# EAGLE board adc2 (EAGLE 5.06)
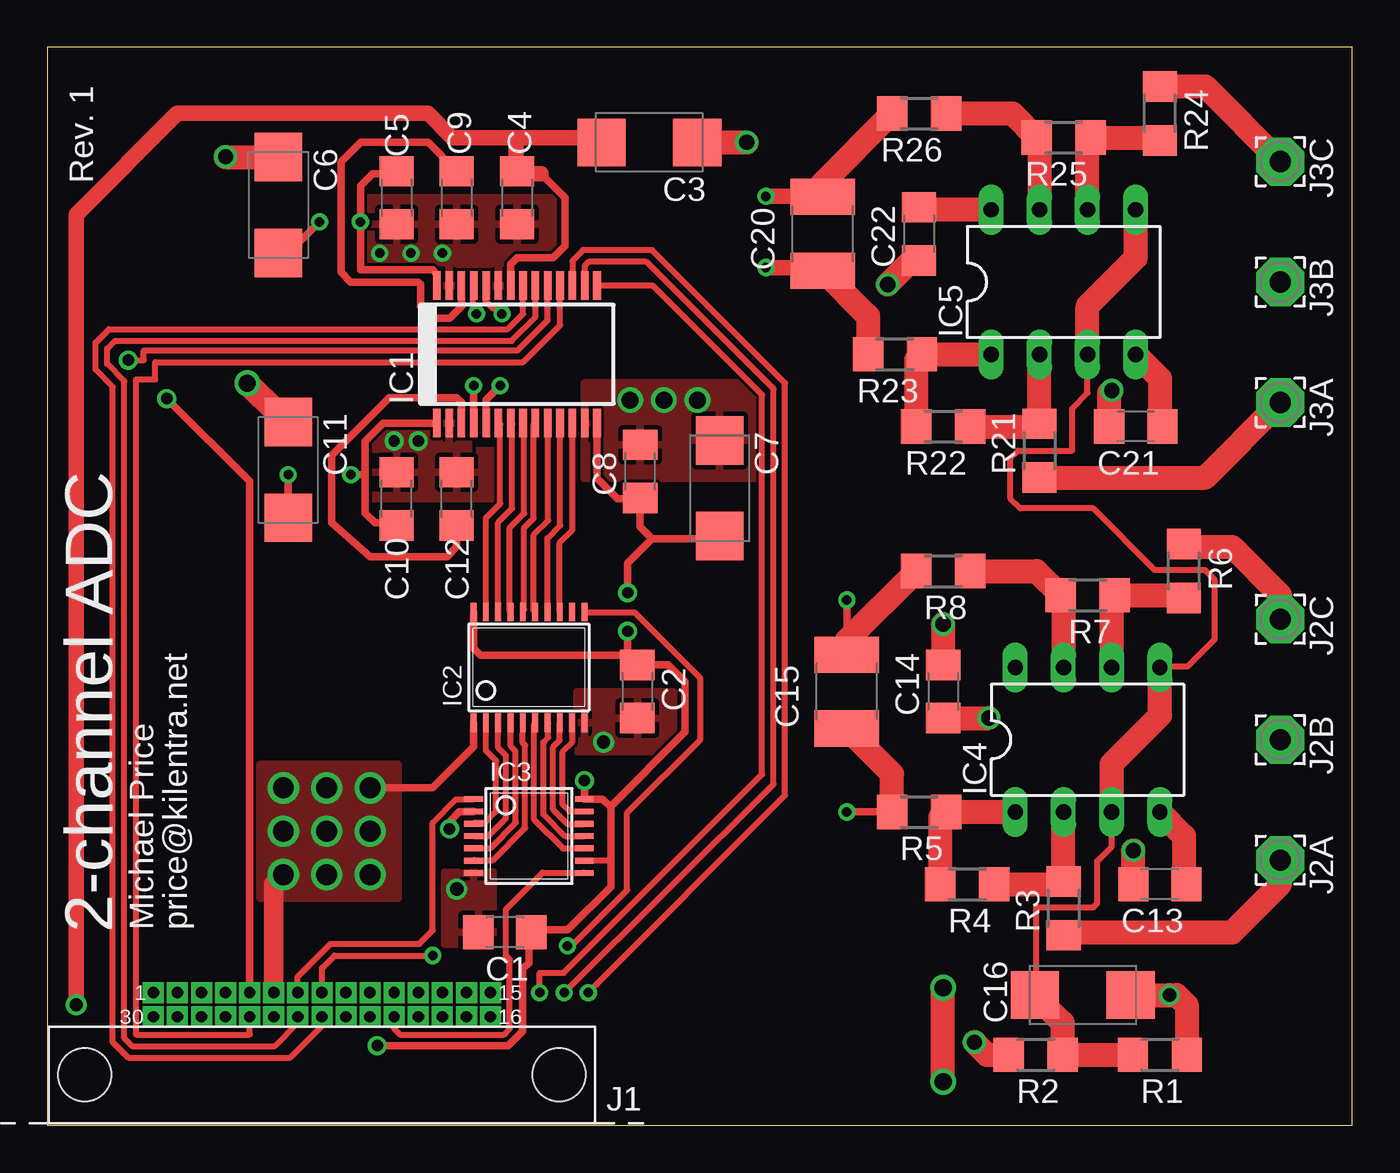
[diagram p0: board, top side]
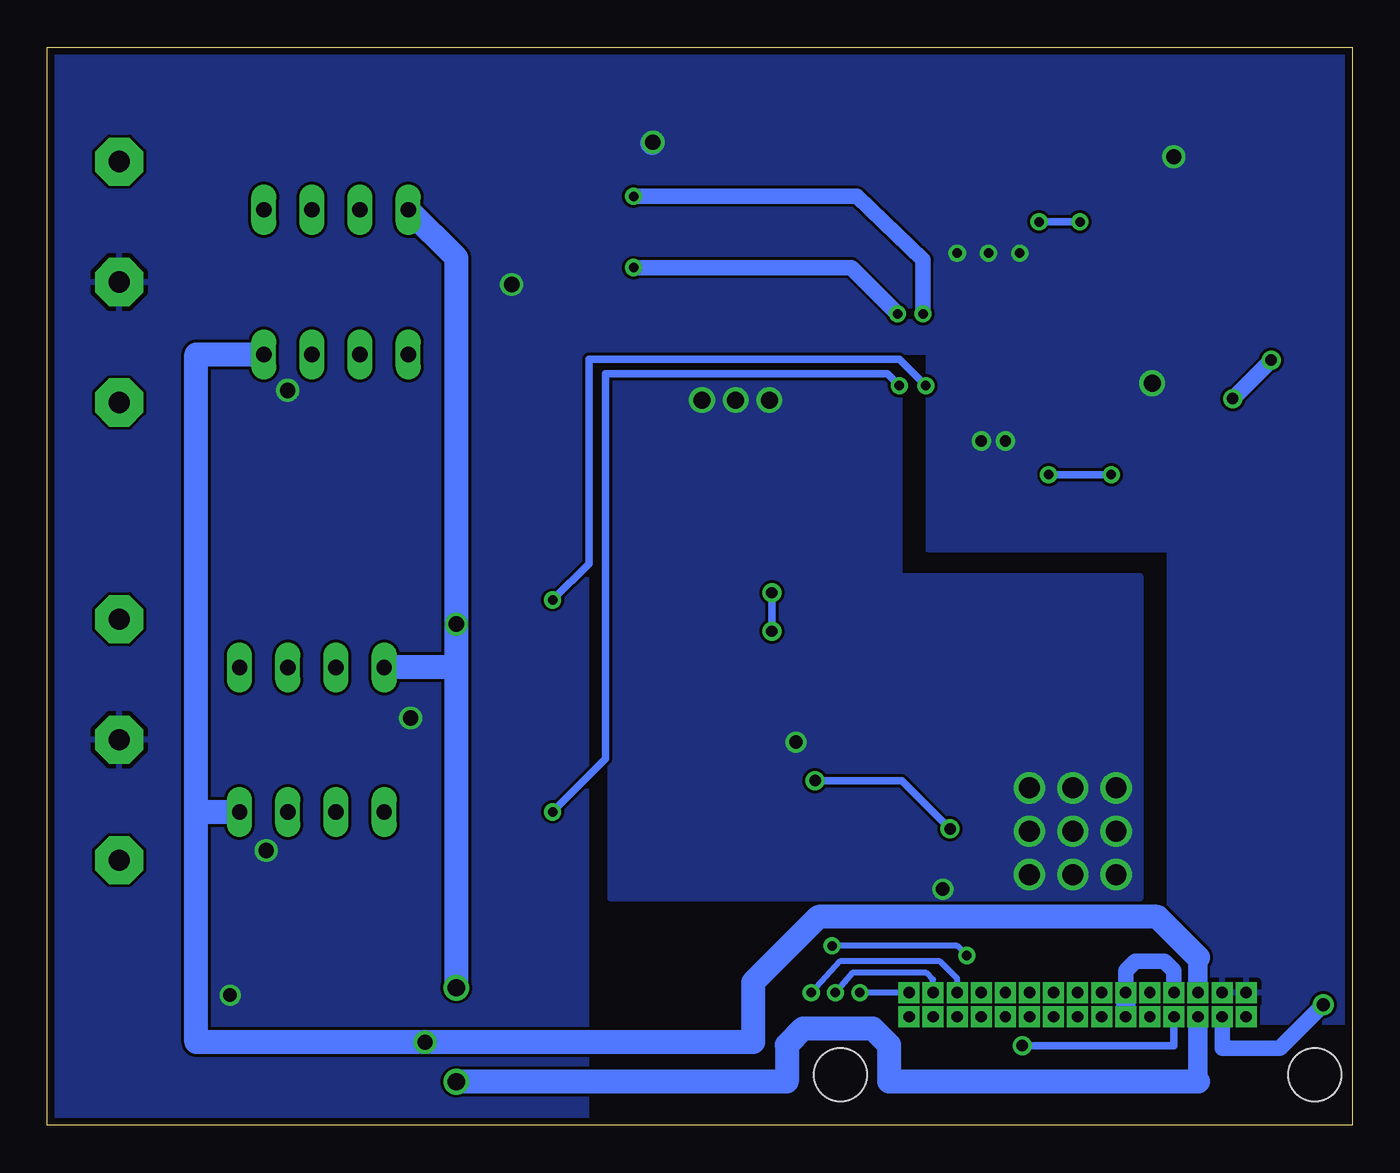
[diagram p1: board, bottom side, seen from below]

Size 68.81 x 56.82 mm. Coordinates in mm from the lower left corner, seen from the top.
Outline: 0,0 68.81,0 68.81,56.82 0,56.82 0,0
Copper layers (1*16): Top 0.035mm / dielectric 1.5mm / Bottom 0.035mm
Design rules "6mils": minimum track width 10mil, minimum drill 15mil, track to track 6mil, track to pad 6mil, pad to pad 6mil, via to via 6mil, smd to smd 6mil, copper to edge 15mil, drill to drill 8mil, minimum pad ring 10mil, minimum via ring 8mil, stop-mask expansion 4mil, vias tented up to drill 0mil, thermal gap 10mil

## Footprints (pad centres in the part's own frame; a part is rotated, then mirrored left to right if it is on the bottom)
C1206 = smd 1.6 x 1.8: 1 -1.4,0; 2 1.4,0
C/6032-28R = smd 2.55 x 2.5: + 2.525,0; - -2.525,0
C1812 = smd 1.9 x 3.4: 1 -1.95,0; 2 1.95,0
SSOP28 = smd 0.4 x 1.5: 1 -4.225,-3.625; 2 -3.575,-3.625; 3 -2.925,-3.625; 4 -2.275,-3.625; 5 -1.625,-3.625; 6 -0.975,-3.625; 7 -0.325,-3.625; 8 0.325,-3.625; 9 0.975,-3.625; 10 1.625,-3.625; 11 2.275,-3.625; 12 2.925,-3.625; 13 3.575,-3.625; 14 4.225,-3.625; 15 4.225,3.625; 16 3.575,3.625; 17 2.925,3.625; 18 2.275,3.625; 19 1.625,3.625; 20 0.975,3.625; 21 0.325,3.625; 22 -0.325,3.625; 23 -0.975,3.625; 24 -1.625,3.625; 25 -2.275,3.625; 26 -2.925,3.625; 27 -3.575,3.625; 28 -4.225,3.625
TSSOP20 = smd 0.305 x 0.991: 1 -2.925,-2.918; 2 -2.275,-2.918; 3 -1.625,-2.918; 4 -0.975,-2.918; 5 -0.325,-2.918; 6 0.325,-2.918; 7 0.975,-2.918; 8 1.625,-2.918; 9 2.275,-2.918; 10 2.925,-2.918; 11 2.925,2.918; 12 2.275,2.918; 13 1.625,2.918; 14 0.975,2.918; 15 0.325,2.918; 16 -0.325,2.918; 17 -0.975,2.918; 18 -1.625,2.918; 19 -2.275,2.918; 20 -2.925,2.918
TSSOP14 = smd 0.305 x 0.991: 1 -1.95,-2.918; 2 -1.3,-2.918; 3 -0.65,-2.918; 4 0,-2.918; 5 0.65,-2.918; 6 1.3,-2.918; 7 1.95,-2.918; 8 1.95,2.918; 9 1.3,2.918; 10 0.65,2.918; 11 0,2.918; 12 -0.65,2.918; 13 -1.3,2.918; 14 -1.95,2.918
DIL08 = drill 0.813 long: 1 -3.81,-3.81; 2 -1.27,-3.81; 3 1.27,-3.81; 4 3.81,-3.81; 5 3.81,3.81; 6 1.27,3.81; 7 -1.27,3.81; 8 -3.81,3.81
FCI-RA-30 = drill 0.6 pad 0.813 square: P$A1 -8.89,0.635; P$A2 -7.62,0.635; P$A3 -6.35,0.635; P$A4 -5.08,0.635; P$A5 -3.81,0.635; P$A6 -2.54,0.635; P$A7 -1.27,0.635; P$A8 0,0.635; P$A9 1.27,0.635; P$A10 2.54,0.635; P$A11 3.81,0.635; P$A12 5.08,0.635; P$A13 6.35,0.635; P$A14 7.62,0.635; P$A15 8.89,0.635; P$A16 8.89,-0.635; P$A17 7.62,-0.635; P$A18 6.35,-0.635; P$A19 5.08,-0.635; P$A20 3.81,-0.635; P$A21 2.54,-0.635; P$A22 1.27,-0.635; P$A23 0,-0.635; P$A24 -1.27,-0.635; P$A25 -2.54,-0.635; P$A26 -3.81,-0.635; P$A27 -5.08,-0.635; P$A28 -6.35,-0.635; P$A29 -7.62,-0.635; P$A30 -8.89,-0.635 | hole 2.8: -12.497,-3.708; 12.497,-3.708
2,54/1,1 = drill 1.118 pad 2.54 octagon: 1 0,0
R1206 = smd 1.6 x 1.803: 1 -1.422,0; 2 1.422,0

## Placement (x,y rotation side)
C1  0.1u  [C1206]  24.13,10.16 180 top
C2  0.1u  [C1206]  31.11,22.86 270 top
C3  10u  [C/6032-28R]  31.75,51.82 180 top
C4  0.1u  [C1206]  24.77,48.9 270 top
C5  0.1u  [C1206]  18.41,48.9 270 top
C6  10u  [C/6032-28R]  12.19,48.51 270 top
C7  10u  [C/6032-28R]  35.46,33.58 270 top
C8  0.1u  [C1206]  31.27,34.47 90 top
C9  0.1u  [C1206]  21.59,48.9 270 top
C10  0.1u  [C1206]  18.41,33.02 90 top
C11  10u  [C/6032-28R]  12.7,34.54 270 top
C12  0.1u  [C1206]  21.59,33.02 90 top
C13  0.1u  [C1206]  58.67,12.7 180 top
C14  0.1u  [C1206]  47.24,22.86 270 top
C15  0.01u  [C1812]  42.16,22.86 90 top
C16  10u  [C/6032-28R]  54.61,6.86 0 top
C20  0.01u  [C1812]  40.89,46.99 90 top
C21  0.1u  [C1206]  57.4,36.83 180 top
C22  0.1u  [C1206]  45.97,46.99 270 top
IC1  PCM4202  [SSOP28]  24.77,40.64 0 top
IC2  74LVTH574  [TSSOP20]  25.4,24.13 0 top
IC3  74164FT  [TSSOP14]  25.4,15.24 270 top
IC4  OPA2134PA  [DIL08]  54.86,20.32 0 top
IC5  OPA2134PA  [DIL08]  53.59,44.45 0 top
J1  RA-30  [FCI-RA-30]  14.48,6.35 0 top
J2A  [2,54/1,1]  65.02,13.97 270 top
J2B  [2,54/1,1]  65.02,20.32 270 top
J2C  [2,54/1,1]  65.02,26.67 270 top
J3A  [2,54/1,1]  65.02,38.1 270 top
J3B  [2,54/1,1]  65.02,44.45 270 top
J3C  [2,54/1,1]  65.02,50.8 270 top
R1  2.5k  [R1206]  58.67,3.71 180 top
R2  12.5k  [R1206]  52.12,3.71 180 top
R3  10k  [R1206]  53.59,11.43 90 top
R4  4.42k  [R1206]  48.51,12.7 180 top
R5  47.5  [R1206]  45.97,16.51 180 top
R6  10k  [R1206]  59.94,29.21 270 top
R7  4.42k  [R1206]  54.86,27.94 180 top
R8  47.5  [R1206]  47.24,29.21 180 top
R21  10k  [R1206]  52.32,35.56 90 top
R22  4.42k  [R1206]  47.24,36.83 180 top
R23  47.5  [R1206]  44.7,40.64 180 top
R24  10k  [R1206]  58.67,53.34 270 top
R25  4.42k  [R1206]  53.59,52.07 180 top
R26  47.5  [R1206]  45.97,53.34 180 top

## Library data of the parts
C1-C16 C20-C22 R1-R8 R21-R26 = rcl
IC1-IC3 J1 = cdp
IC4 IC5 = linear
J2A J2B J2C J3A J3B J3C = wirepad

## Nets
+15V: C14.1 C22.1 IC4.8 IC5.8 J1.P$A28
-2.5V: C16.- IC4.3 IC4.5 IC5.3 IC5.5 R1.2 R2.1
-15V: C13.1 C21.1 IC4.4 IC5.4 J1.P$A3 R2.2
A3.3V: J1.P$A30
A5V: C3.+ C4.1 IC1.22 J1.P$A29
AGND: C3.- C4.2 C5.2 C6.- C9.2 C10.2 C11.- C12.2 C13.2 C14.2 C16.+ C21.2 C22.2 IC1.2 IC1.23 IC1.27 J1.P$A1 J1.P$A2 J2B.1 J3B.1 R1.1
CLIPL: IC1.21 J1.P$A23
CLIPR: IC1.20 J1.P$A24
CLK: IC1.18 J1.P$A26
D3.3V: C1.1 C2.1 C7.+ C8.1 IC1.14 IC2.20 IC3.2 IC3.9 IC3.14 J1.P$A27
DATA0: IC1.17 J1.P$A13
DATA1: IC1.16 J1.P$A14
DATA2: IC1.15 J1.P$A15
DGND: C1.2 C2.2 C7.- C8.2 IC1.13 IC2.1 IC2.10 IC3.7 J1.P$A4 J1.P$A6 J1.P$A25
HWCON: IC3.1 J1.P$A7
N$1: IC2.2 IC3.3
N$2: IC2.3 IC3.4
N$3: IC2.4 IC3.5
N$4: IC2.5 IC3.6
N$5: IC2.6 IC3.10
N$6: IC2.7 IC3.11
N$7: IC2.8 IC3.12
N$8: IC3.8 J1.P$A20
N$9: IC2.9 IC3.13
N$10: IC1.6 IC2.19
N$11: IC1.7 IC2.18
N$12: IC1.8 IC2.17
N$13: IC1.9 IC2.16
N$14: IC1.10 IC2.15
N$15: IC1.11 IC2.14
N$16: IC1.12 IC2.13
N$18: C10.1 C11.+ IC1.1
N$19: C5.1 C6.+ IC1.28
N$20: C9.1 IC1.26
N$21: IC4.2 R3.2 R4.1
N$22: C12.1 IC1.3
N$23: IC4.6 R6.2 R7.1
N$24: IC4.1 R4.2 R5.1
N$25: IC5.2 R21.2 R22.1
N$26: IC4.7 R7.2 R8.1
N$27: IC2.11 J1.P$A8
N$29: IC5.1 R22.2 R23.1
N$30: IC5.6 R24.2 R25.1
N$31: IC5.7 R25.2 R26.1
RESET: IC1.19 J1.P$A5
SVINL+: J2A.1 R3.1
SVINL-: J2C.1 R6.1
SVINR+: J3A.1 R21.1
SVINR-: J3C.1 R24.1
VINL+: C15.2 IC1.4 R8.2
VINL-: C15.1 IC1.5 R5.2
VINR+: C20.2 IC1.25 R26.2
VINR-: C20.1 IC1.24 R23.2

## Tracks (layer width: path | path; a pad name or v marks a point on that pad's centre or on a via)
+15V  (via drill 0.8, 0.9)
  Top 1.27: IC5.8 46.1,48.26 C22.1 | v47.24,2.29 v47.24,7.24 | C14.1 v47.24,26.42
  Bottom 1.016: 8.13,2.29 J1.P$A28
  Bottom 1.27: 8.13,2.29 24.41,2.29 24.41,4.22 25.27,5.08 28.96,5.08 29.82,4.22 29.82,2.29 v47.24,2.29 | v47.24,7.24 C14.1 | C14.1 v47.24,26.42 47.24,45.72 IC5.8 | IC4.8 47.37,24.13 C14.1
-2.5V
  Top 0.305: IC4.3 56.13,14.68 55.37,13.92 55.37,11.68 55.17,11.48 52.17,11.48 52.17,6.95 C16.- | 55.68,3.71 55.47,3.91 | IC5.3 54.86,38.61 54.05,37.8 54.05,35.56 51.21,35.56 50.8,35.15 50.8,33.02 51.31,32.51 55.17,32.51 58.42,29.26 61.06,29.26 61.57,28.75 61.57,25.6 60.15,24.18 58.73,24.18 IC4.5
  Top 1.27: IC4.3 56.13,19.05 58.67,21.59 IC4.5 | IC5.3 54.86,43.18 57.4,45.72 IC5.5 | R1.2 55.68,3.71 R2.1 53.54,5.4 C16.-
-15V  (via drill 0.8)
  Top 1.27: IC4.4 59.94,15.24 59.94,12.83 C13.1 | IC5.4 58.67,39.37 58.67,36.96 C21.1 | R2.2 49.55,3.71 v48.9,4.37
  Bottom 1.016: J1.P$A3 8.13,8.84
  Bottom 1.27: IC4.4 60.96,16.51 60.96,16.66 | 60.96,16.66 60.96,40.64 IC5.4 | 60.96,16.66 60.96,4.37 v48.9,4.37 31.6,4.37 31.6,7.52 28.14,10.97 10.26,10.97 8.13,8.84
A5V  (via drill 0.7)
  Top 0.406: IC1.22 24.44,45.4 24.77,45.72 26.67,45.72 27.3,46.35 27.3,48.9 26.04,50.16 24.89,50.16 C4.1
  Top 0.813: 24.64,52.07 21.34,52.07 20.07,53.34 6.86,53.34 1.52,48.01 v1.52,6.35 | 26.04,50.16 24.71,50.16 24.71,51.99 24.64,52.07 | 24.64,52.07 28.97,52.07 C3.+
  Bottom 0.813: v1.52,6.35 3.81,4.06 6.86,4.06 J1.P$A29
AGND  (via drill 0.5, 0.6, 0.7, 0.8, 0.9)
  Top 1.27: C11.- v10.54,39.12 | C13.2 v57.27,14.47 v57.28,14.48 | C14.2 v49.65,21.46 v49.66,21.46 | C21.2 56,38.6 v56.13,38.73 | C22.2 45.85,45.59 45.59,45.59 v44.32,44.32 | C3.- v36.88,51.82 | C6.- 9.41,51.04 v9.4,51.05 | R1.1 60.1,6.33 59.56,6.86 v59.18,6.86 C16.+
  Bottom 1.27: v36.88,51.82 36.91,51.79
  other vias: 18.29,36.07 19.56,36.07 17.53,45.97 20.83,45.97 19.18,45.97
  pour Top: 16.51,48.9 26.67,48.9 26.67,43.81 20.95,43.81 20.95,45.09 16.51,45.09
  pour Top: 16.51,37.47 22.23,37.47 22.23,35.56 23.5,35.56 23.5,33.02 16.51,33.02
  pour Bottom: 9.65,5.46 0.38,5.46 0.38,56.39 68.58,56.39 68.58,0.25 40.39,0.25 40.39,40.77 22.35,40.77 22.35,30.35 9.65,30.35
CLIPL
  Top 0.305: IC1.21 25.09,42.77 24.28,41.96 3.25,41.96 2.54,41.25 2.54,39.83 3.45,38.91 3.45,4.37 4.27,3.56 12.8,3.56 14.48,5.23 J1.P$A23
CLIPR
  Top 0.305: IC1.20 25.74,42.61 24.49,41.35 3.56,41.35 3.15,40.95 3.15,40.13 4.06,39.22 4.06,4.57 4.47,4.17 11.99,4.17 13.21,5.38 J1.P$A24
CLK
  Top 0.305: IC1.18 27.04,42.18 25.09,40.23 5.69,40.23 5.69,39.32 4.67,39.32 4.67,4.78 10.67,4.78 J1.P$A26
D3.3V  (via drill 0.6)
  Top 0.305: IC3.9 29.64,13.94 29.72,14.02
  Top 0.406: IC2.20 22.48,25.15 22.86,24.77 30.61,24.77 | 30.61,24.77 C2.1 32.74,24.26 33.63,23.37 33.63,20.73 29.69,16.79 | C8.1 30.95,32.75 | C8.1 31.27,31.55 31.9,30.91 | 31.9,30.91 35.32,30.91 C7.+ | 29.69,16.79 29.72,16.76 29.72,14.02 29.72,12.57 27.43,10.29 25.66,10.29 C1.1 25.4,10.29 25.4,8.56 25.07,8.26 25.07,4.95 24.31,4.19 v17.4,4.19 | 29.69,16.79 29.29,17.19 IC3.14 v28.32,18.16 | IC1.14 28.99,34.1 30.07,33.02 31.22,33.02 C8.1 | 30.61,24.77 v30.61,26.03 v30.61,26.04 | v30.61,28.07 30.61,29.62 31.9,30.91 | v21.21,15.62 21.21,16 21.72,16.51 22.45,16.51 IC3.2
  Bottom 0.406: v17.4,4.19 9.4,4.19 J1.P$A27 | v30.61,26.04 v30.61,28.07 | v28.32,18.16 23.75,18.16 v21.21,15.62
DATA0  (via drill 0.5)
  Top 0.305: IC1.17 27.69,45.57 28.25,46.13 31.9,46.13 38.91,39.12 38.91,17.4 v28.52,6.99
  Bottom 0.305: J1.P$A13 20.83,7.72 21.74,8.64 27.03,8.64 v28.52,6.99
DATA1  (via drill 0.5)
  Top 0.305: IC1.16 28.34,45.31 28.55,45.52 31.6,45.52 38.3,38.81 38.3,17.98 v27.25,6.99
  Bottom 0.305: J1.P$A14 22.1,7.67 22.45,8.03 26.36,8.03 v27.25,6.99
DATA2  (via drill 0.5)
  Top 0.305: IC1.15 31.93,44.27 37.69,38.51 37.69,18.49 27.23,8.03 25.96,8.03 v25.96,6.99
  Bottom 0.305: J1.P$A15 v25.96,6.99
DGND  (via drill 0.7, 0.9, 1.1)
  Top 0.406: IC2.1 22.48,19.93 20.32,17.78 v17.02,17.78
  Top 1.016: J1.P$A6 11.94,12.7
  Bottom 0.813: 9.4,6.86 J1.P$A4 9.4,8.13 9.91,8.64 11.43,8.64 11.94,8.13 J1.P$A6 11.94,6.86
  Bottom 1.016: J1.P$A6 J1.P$A25
  other vias: 12.45,17.78 14.73,17.78 12.45,15.49 14.73,15.49 17.02,15.49 12.45,13.21 14.73,13.21 17.02,13.21 21.59,12.45 29.34,20.19 30.73,38.23 32.51,38.23 34.29,38.23
  pour Top: 20.95,13.34 23.5,13.34 23.5,9.53 20.95,9.53
  pour Top: 27.94,19.68 27.94,22.86 33.02,22.86 33.02,19.68
  pour Top: 28.32,34.09 37.36,34.11 37.47,39.14 28.32,39.14
  pour Bottom: 11.18,11.94 39.12,11.94 39.12,39.37 23.88,39.37 23.88,28.96 11.18,28.96
  pour Top: 11.18,11.94 18.54,11.94 18.54,19.05 11.18,19.05
HWCON
  Top 0.305: J1.P$A7 13.21,7.82 14.94,9.55 19.61,9.55 20.32,10.26 20.32,15.95 21.54,17.17 22.46,17.17 IC3.1
N$1
  Top 0.305: IC2.2 23.12,19.75 23.67,19.2 23.67,16.56 23.06,15.95 22.54,15.95 IC3.3
N$2
  Top 0.305: IC2.3 23.77,19.89 24.18,19.48 24.18,16.18 23.24,15.24 IC3.4
N$3
  Top 0.305: IC2.4 24.43,19.98 24.69,19.71 24.7,15.94 23.37,14.61 22.5,14.61 IC3.5
N$4
  Top 0.305: IC2.5 25.07,20.15 25.2,20.02 25.2,15.68 23.5,13.97 22.51,13.97 IC3.6
N$5
  Top 0.305: IC3.10 27.19,14.59 25.68,16.1 25.68,21.14 IC2.6
N$6
  Top 0.305: IC3.11 27.3,15.24 26.16,16.38 26.16,20.19 26.42,20.45 26.42,21.17 IC2.7
N$7
  Top 0.305: IC2.8 27.02,20.29 26.67,19.94 26.67,16.64 27.43,15.88 28.3,15.88 IC3.12
N$8
  Top 0.305: J1.P$A20 18.29,5.08 18.59,4.78 24.08,4.78 24.38,5.08 24.38,8.74 24.18,8.94 24.18,11.38 26.11,13.31 28.3,13.31 IC3.8
N$9
  Top 0.305: IC3.13 27.53,16.54 27.18,16.89 27.18,19.68 27.69,20.19 27.69,21.2 IC2.9
N$10
  Top 0.305: IC2.19 23.12,32.02 23.88,32.77 23.88,36.93 IC1.6
N$11
  Top 0.305: IC2.18 23.77,31.78 24.51,32.51 24.51,36.96 IC1.7
N$12
  Top 0.305: IC1.8 25.15,36.96 25.15,32.26 24.38,31.5 24.38,27.09 IC2.17
N$13
  Top 0.305: 25.78,36.93 IC1.9 25.65,36.93 25.65,32 25.15,31.5 25.15,27.18 25.07,27.11 IC2.16
N$14
  Top 0.305: IC1.10 26.42,36.99 26.42,31.88 25.65,31.11 25.65,27.12 IC2.15
N$15
  Top 0.305: IC2.14 26.38,30.95 27.05,31.62 27.05,37 IC1.11
N$16
  Top 0.305: IC2.13 27.02,30.71 27.69,31.37 IC1.12
N$18  (via drill 0.5)
  Top 0.406: IC1.1 17.71,37.02 16.76,36.07 16.76,34.29 | C10.1 18.29,31.75 17.27,31.75 16.76,32.26 16.76,34.29 | v16,34.29 16.76,34.29 | C11.+ v12.7,34.29
  Bottom 0.406: v12.7,34.29 v16,34.29
N$19  (via drill 0.5)
  Top 0.406: IC1.28 20.54,44.87 20.32,45.09 16.51,45.09 v16.51,47.62 16.51,49.53 17.14,50.16 18.29,50.16 C5.1 | C6.+ 12.71,45.99 v14.35,47.62
  Bottom 0.406: v14.35,47.62 v16.51,47.62
N$20
  Top 0.406: IC1.26 21.84,43.18 21.21,42.55 20.32,42.55 19.68,43.18 19.68,44.32 19.56,44.45 16,44.45 15.49,44.96 15.49,50.8 16.51,51.82 20.07,51.82 C9.1
N$21
  Top 1.27: IC4.2 R3.2 53.44,12.7 R4.1
N$22
  Top 0.406: IC1.3 21.84,38.1 21.59,38.35 18.03,38.35 14.99,35.31 14.99,31.75 17.02,29.97 21.08,29.97 21.59,30.48 C12.1
N$23
  Top 1.27: R6.2 59.79,27.94 R7.1 56.13,27.79 IC4.6
N$24
  Top 1.27: IC4.1 R5.1 47.09,16.21 R4.2
N$25
  Top 1.27: IC5.2 R21.2 52.17,36.83 R22.1
N$26
  Top 1.27: R8.1 52.17,29.21 R7.2 53.59,27.79 IC4.7
N$27  (via drill 0.5)
  Top 0.305: J1.P$A8 14.48,8.28 15.14,8.94 v20.32,8.94 | v27.43,9.45 27.64,9.45 30.58,12.39 30.58,16.46 34.44,20.32 34.44,23.57 30.99,27.03 28.35,27.03 IC2.11
  Bottom 0.305: v27.43,9.45 20.83,9.45 v20.32,8.94
N$29
  Top 1.27: IC5.1 R23.1 45.82,40.34 R22.2
N$30
  Top 1.27: R24.2 58.52,52.07 R25.1 54.86,51.92 IC5.6
N$31
  Top 1.27: R26.1 50.9,53.34 R25.2 52.32,51.92 IC5.7
RESET  (via drill 0.6)
  Top 0.305: IC1.19 26.39,42.44 24.79,40.84 5.08,40.84 5.08,40.34 v4.27,40.34
  Top 0.406: J1.P$A5 10.67,33.93 v6.3,38.3
  Bottom 0.813: v6.3,38.3 v4.27,40.34
SVINL+
  Top 1.27: J2A.1 65.02,12.7 62.48,10.16 53.75,10.16 R3.1
SVINL-
  Top 1.27: J2C.1 65.02,27.94 62.48,30.48 60.1,30.48 R6.1
SVINR+
  Top 1.27: R21.1 61.06,34.14 J3A.1
SVINR-
  Top 1.27: R24.1 61.06,54.76 J3C.1
VINL+  (via drill 0.5)
  Top 0.406: IC1.4 22.49,38.98 v22.48,38.99 | v42.16,27.69 C15.2
  Top 1.27: C15.2 42.16,25.55 R8.2
  Bottom 0.406: v22.48,38.99 23.88,40.39 40.26,40.39 40.26,29.59 v42.16,27.69
VINL-  (via drill 0.5)
  Top 0.406: IC1.5 23.14,38.25 v23.88,38.99 | v42.16,16.51 R5.2
  Top 1.27: R5.2 44.55,18.52 C15.1
  Bottom 0.406: v23.88,38.99 24.51,39.62 39.37,39.62 39.37,19.3 v42.16,16.51
VINR+  (via drill 0.5)
  Top 0.305: v22.63,42.77 22.45,42.95 22.45,44.2 | 22.45,44.2 22.45,44.3 | IC1.25 22.49,44.23 22.45,44.2
  Top 0.813: v37.9,48.97 40.84,48.97
  Top 1.27: R26.2 40.89,49.68 C20.2 40.87,48.94 40.84,48.97
  Bottom 0.813: v37.9,48.97 26.11,48.97 22.63,45.62 v22.63,42.77
VINR-  (via drill 0.5)
  Top 0.305: IC1.24 23.11,44.24 23.11,43.43 23.5,43.05 23.7,43.05 v23.98,42.77
  Top 0.813: v37.9,45.21 40.89,45.21 41.05,45.21
  Top 1.27: R23.2 43.28,42.65 C20.1 40.89,45.21
  Bottom 0.813: v37.9,45.21 26.42,45.21 v23.98,42.77

## Text on the board
tPlace: Rev. 1 | 2-channel ADC | Michael Price | price@kilentra.net